# Altium PCB Module_Type_A.PcbDoc
Units mm, origin at the board's own origin, x right, y up, seen from the top; angles counter-clockwise.
Board outline 50 x 50 mm, 2 copper layers (Top Layer, Bottom Layer), stack 0.98 mm thick; 1 components, 26 nets, 72 pads, 72 vias.
Unrouted connection lines stored in the file: 32.
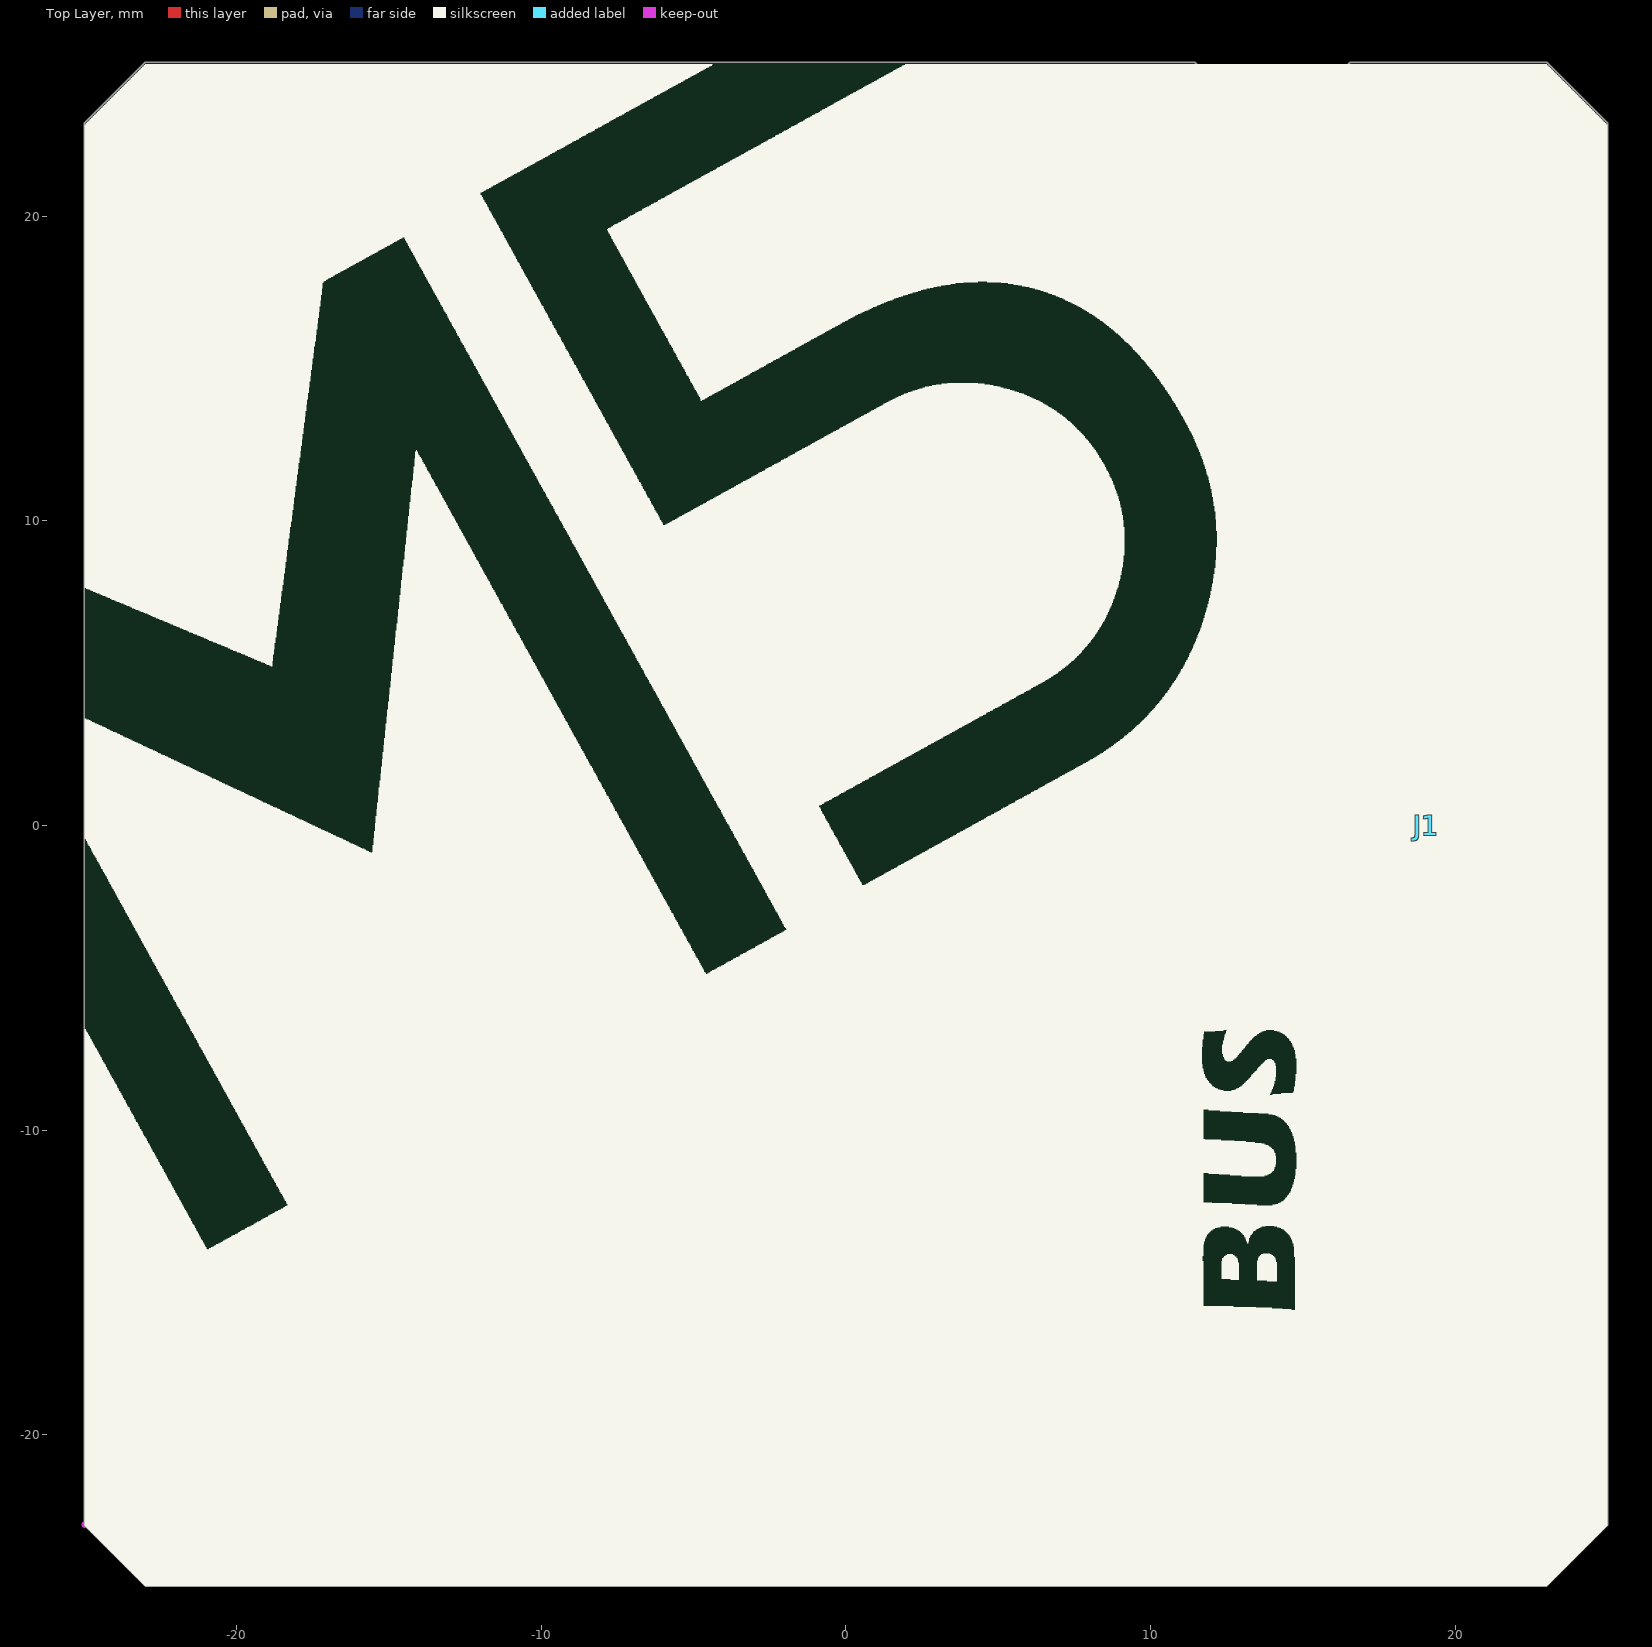
[diagram p0: Top Layer view]
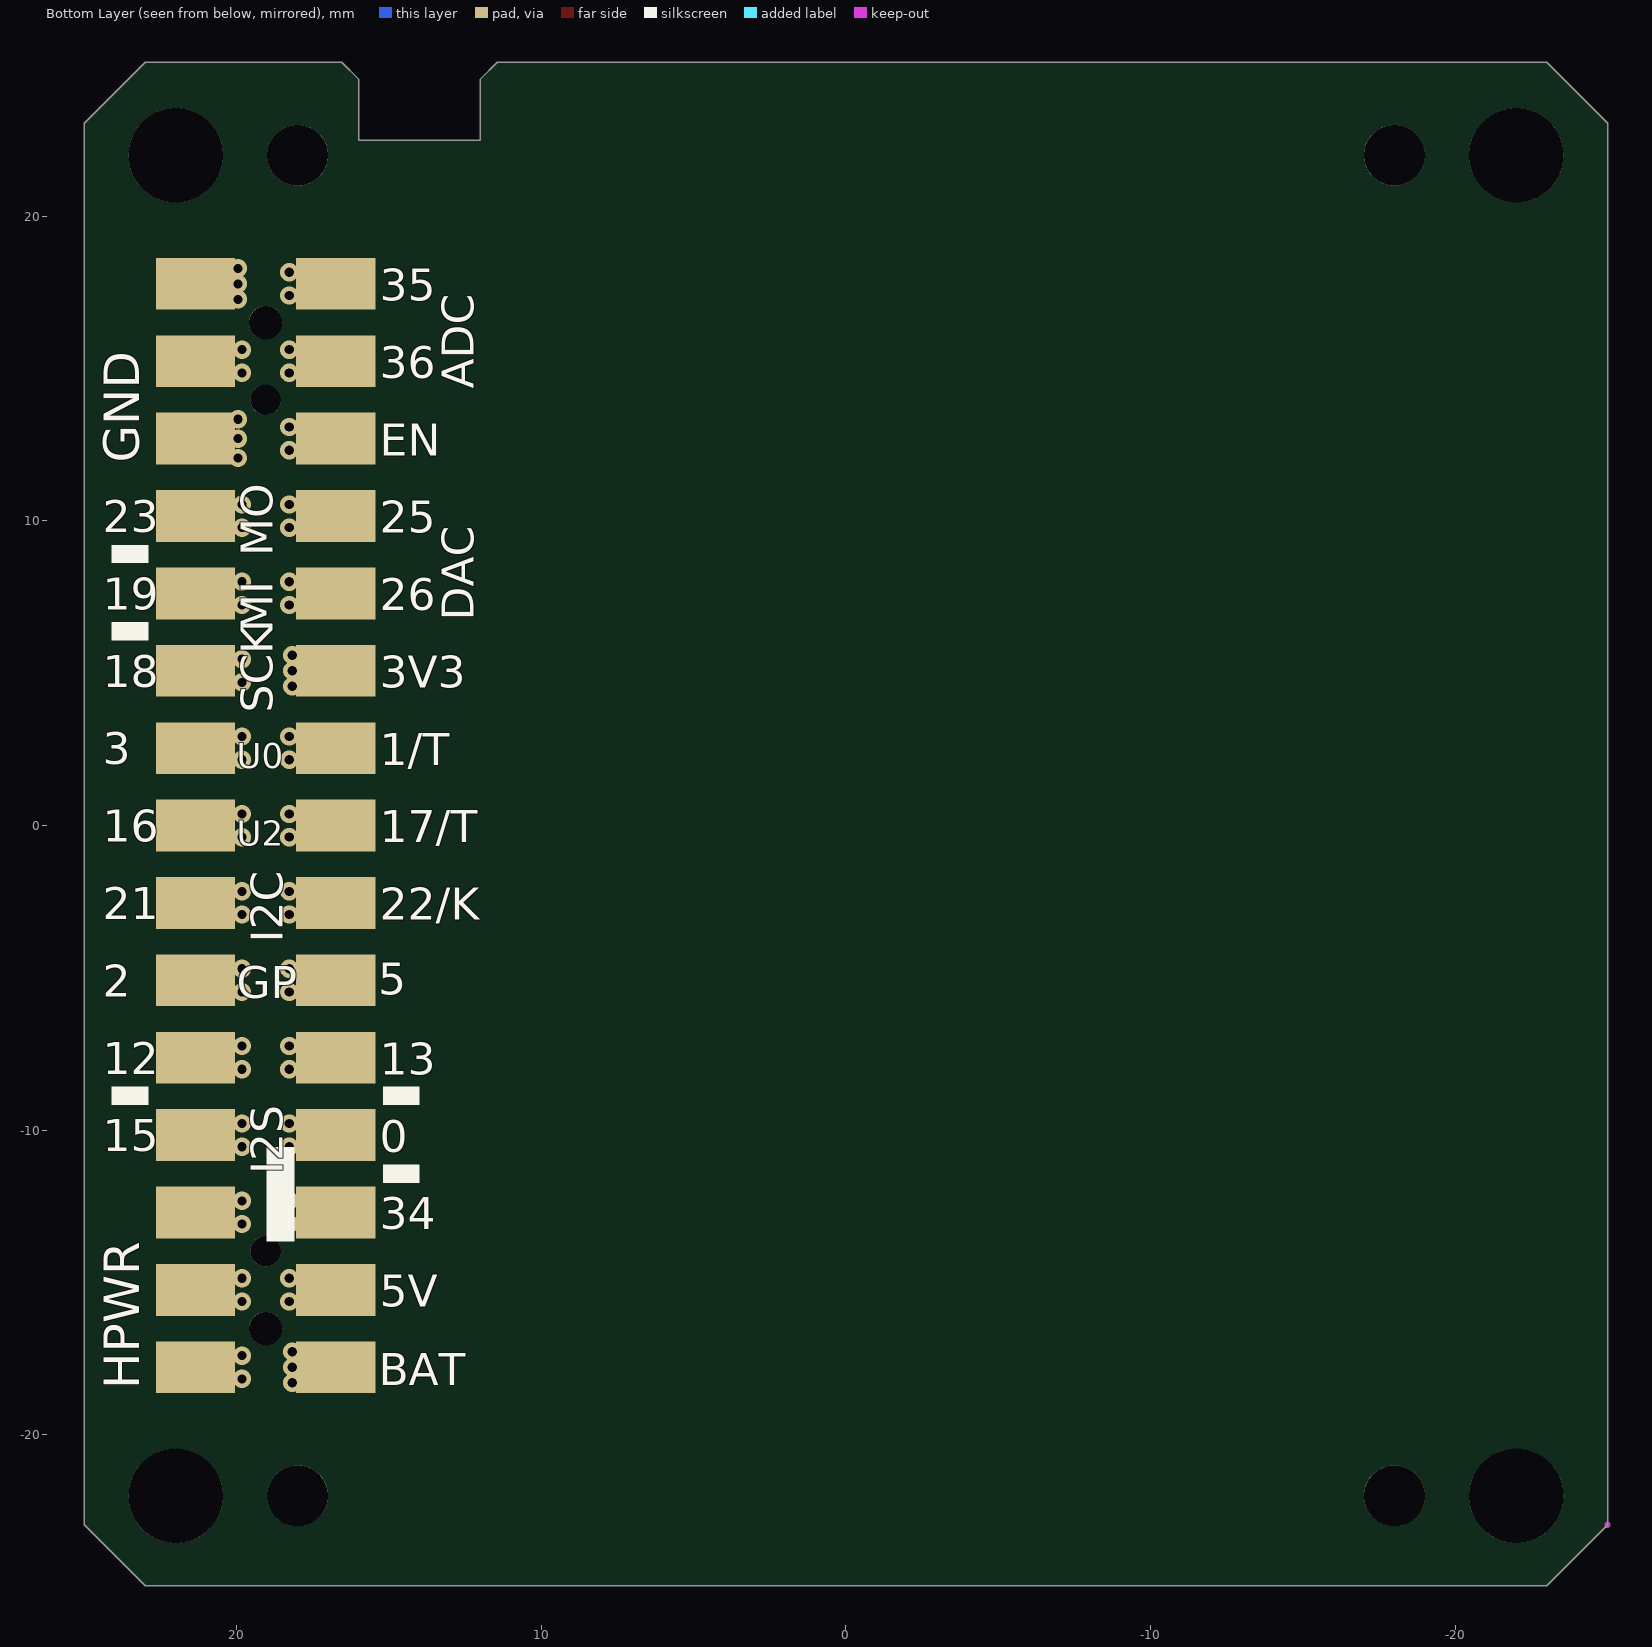
[diagram p1: Bottom Layer view, seen from below]

## Layer stack, top to bottom
Top Solder: solder mask 0.0102, Solder Resist, Dk 3.5
Top Layer: signal copper 0.0356
Dielectric1: dielectric 0.9086, FR-4, Dk 4.8
Bottom Layer: signal copper 0.0356
Bottom Solder: solder mask 0.0102, Solder Resist, Dk 3.5

## Board outline
-25,-22.949 -23,-24.949 23,-24.949 25,-22.949 25,23.051 23,25.051 16.551,25.051 16,24.5 16,22.5 12,22.5 12,24.5 11.449,25.051 -23,25.051 -25,23.051

## Design rules (kind name [scope] priority, off if disabled: settings)
Clearance [All] p1: gap=0.152 ignorepadtopadclearanceinfootprint=FALSE except(0: Arc-Hole Track-Hole SMDPad-Hole THPad-Hole Via-Hole Fill-Hole Poly-Hole Region-Hole Text-Hole)
PlaneConnect [All] p1: planeconnectstyle=Direct reliefexpansion=0.508 reliefentries=4 reliefconductorwidth=0.254 reliefairgap=0.254
PolygonConnect [All] p1: connectstyle=Direct reliefconductorwidth=0.254 reliefentries=4 polygonreliefangle="90 Angle" airgapwidth=0.254
RoutingVias [All] p1: holewidth=0.711 width=1.27 viastyle="Through Hole" minholewidth=0.711 minwidth=1.27 maxholewidth=0.711 maxwidth=1.27
SolderMaskExpansion [All] p1: expansion=0.102 istentingtop=FALSE
Width [All] p1: maxlimit=0.635 minlimit=0.152 preferedwidth=0.381 minimp=50.000000 maximp=50.000000 favimp=50.000000
29 further rules are at their usual default settings.

## Components (designator, comment, footprint, x,y, rotation, side; value= is the part's Value field where it differs from the comment)
J1 "M5Stack_BUS" M5Stack_BUS_30P 21.35,17.78 r0 top locked

## Footprints (in the part's own frame and the unit in brackets; to place one, negate y for a bottom-side part, rotate by r counter-clockwise, add the part's x,y. Pads: shape width x height; smd on the part's side, far side on the other; paste and mask are expansions set on the pad)
M5Stack_BUS_30P [mm]
  round 1 hole 1: 0(-2.3,-3.81) 0(-2.3,-31.75)
  round 1.1 hole 1.1: 0(-2.3,-1.27) 0(-2.3,-34.29)
  rect 2.6x1.7 smd: 1(0,0) 2(-4.6,0) 3(0,-2.54) 4(-4.6,-2.54) 5(0,-5.08) 6(-4.6,-5.08) 7(0,-7.62) 8(-4.6,-7.62) 9(0,-10.16) 10(-4.6,-10.16) 11(0,-12.7) 12(-4.6,-12.7) 13(0,-15.24) 14(-4.6,-15.24) 15(0,-17.78) 16(-4.6,-17.78) 17(0,-20.32) 18(-4.6,-20.32) 19(0,-22.86) 20(-4.6,-22.86) 21(0,-25.4) 22(-4.6,-25.4) 23(0,-27.94) 24(-4.6,-27.94) 25(0,-30.48) 26(-4.6,-30.48) 27(0,-33.02) 28(-4.6,-33.02) 29(0,-35.56) 30(-4.6,-35.56)
  rect 2.6x1.7 smd far side: 1(0,0) 2(-4.6,0) 3(0,-2.54) 4(-4.6,-2.54) 5(0,-5.08) 6(-4.6,-5.08) 7(0,-7.62) 8(-4.6,-7.62) 9(0,-10.16) 10(-4.6,-10.16) 11(0,-12.7) 12(-4.6,-12.7) 13(0,-15.24) 14(-4.6,-15.24) 15(0,-17.78) 16(-4.6,-17.78) 17(0,-20.32) 18(-4.6,-20.32) 19(0,-22.86) 20(-4.6,-22.86) 21(0,-25.4) 22(-4.6,-25.4) 23(0,-27.94) 24(-4.6,-27.94) 25(0,-30.48) 26(-4.6,-30.48) 27(0,-33.02) 28(-4.6,-33.02) 29(0,-35.56) 30(-4.6,-35.56)

## Free pads (board coordinates)
  round 3.1 hole 3.1: 0(-22,-22) 0(-22,22) 0(22,-22) 0(22,22)
  round 2 hole 2: 0(-18,-22) 0(-18,22) 0(18,-22) 0(18,22)

## Via types
v1: diameter 0.6, hole 0.3, Top Layer to Bottom Layer, tented both sides, 72 vias

## Nets (pads, with @x,y where several pads share a name; then routed paths per layer and width w, separated by ;. In a path a pad name is that pad's centre, name@x,y a point inside that pad or via, vN(x,y) a via of type N, cw(c..) or ccw(c..) an arc to the next point about the centre after c; other vN are vias at no path point)
3.3V: J1.12
  other v1: 18.175,4.572 18.175,5.08 18.175,5.588
5V: J1.28
  other v1: 18.274,-15.621 18.274,-14.859
BATTERY: J1.30
  other v1: 18.175,-18.288 18.175,-17.78 18.175,-17.272
EN: J1.6
  other v1: 18.274,12.319 18.274,12.319 18.274,13.081 18.274,13.081
GND: J1.1 J1.3 J1.5
  other v1: 19.953,12.065 19.953,12.7 19.953,13.335 19.826,14.859 19.826,15.621 19.953,17.272 19.953,17.78 19.953,18.288
GPIO0: J1.24
  other v1: 18.274,-10.541 18.274,-9.779
GPIO1: J1.14
  other v1: 18.274,2.159 18.274,2.921
GPIO2: J1.19
  other v1: 19.826,-5.461 19.826,-4.699
GPIO3: J1.13
  other v1: 19.826,2.159 19.826,2.921
GPIO5: J1.20
  other v1: 18.274,-5.461 18.274,-4.699
GPIO12: J1.21
  other v1: 19.826,-8.001 19.826,-7.239
GPIO13: J1.22
  other v1: 18.274,-8.001 18.274,-7.239
GPIO15: J1.23
  other v1: 19.826,-10.541 19.826,-9.779
GPIO16: J1.15
  other v1: 19.826,-0.381 19.826,0.381
GPIO17: J1.16
  other v1: 18.274,-0.381 18.274,0.381
GPIO18: J1.11
  other v1: 19.826,4.699 19.826,5.461
GPIO19: J1.9
  other v1: 19.826,7.239 19.826,7.239 19.826,8.001 19.826,8.001
GPIO21: J1.17
  other v1: 19.826,-2.921 19.826,-2.159
GPIO22: J1.18
  other v1: 18.274,-2.921 18.274,-2.159
GPIO23: J1.7
  other v1: 19.826,9.779 19.826,9.779 19.826,10.541 19.826,10.541
GPIO25: J1.8
  other v1: 18.274,9.779 18.274,9.779 18.274,10.541 18.274,10.541
GPIO26: J1.10
  other v1: 18.274,7.239 18.274,8.001
GPIO34: J1.26
  other v1: 18.274,-13.081 18.274,-12.319
GPIO35: J1.2
  other v1: 18.274,17.399 18.274,18.161
GPIO36: J1.4
  other v1: 18.274,14.859 18.274,15.621
HPWR: J1.25 J1.27 J1.29
  other v1: 19.826,-18.161 19.826,-17.399 19.826,-15.621 19.826,-14.859 19.826,-13.081 19.826,-12.319
pads on no net: J1.0

## Keep-outs
Keep-Out Layer:
  lines w0.2: -25,-22.949 -25,-22.949

## Silkscreen, mask and mechanical layers (free items; w line width, h text height)
Top Overlay:
  drawing of 5550 lines, arcs and shapes, not listed
Mechanical 1:
  lines w0.127: -25,-23 -25,23 -23,25 11.449,25 12,24.449 12,22.449 16,22.449 16,24.449 16.551,25 23,25 25,23 25,-23 23,-25 -23,-25 -25,-23 ; 0,-25 0,-25

## Text inside footprints (layer, text, board x,y; h text height)
J1: Bottom Overlay "35" at 15.3,16.88 h1.8; Bottom Overlay "I2S" at 18.15,-11.45 h1.8 r270; Bottom Overlay "5" at 15.35,-5.9 h1.8; Bottom Overlay "EN" at 15.3,11.8 h1.8; Bottom Overlay "16" at 24.4,-0.88 h1.8; Bottom Overlay "22/K" at 15.3,-3.44 h1.8; Bottom Overlay "17/T" at 15.3,-0.9 h1.8; Bottom Overlay "ADC" at 11.875,14.34 h1.8 r270; Bottom Overlay "26" at 15.3,6.72 h1.8; Bottom Overlay "25" at 15.3,9.26 h1.8; Bottom Overlay "U2" at 20,-0.94 h1.4; Bottom Overlay "15" at 24.4,-11.04 h1.8; Bottom Overlay "19" at 24.4,6.74 h1.8; Bottom Overlay "GND" at 22.8,11.9 h2 r270; Bottom Overlay "SCK" at 18.475,3.7 h1.8 r270; Bottom Overlay "GP" at 20,-6.02 h1.8; Bottom Overlay "MO" at 18.475,8.84 h1.8 r270; Bottom Overlay "34" at 15.3,-13.6 h1.8; Bottom Overlay "13" at 15.3,-8.52 h1.8; Bottom Overlay "U0" at 20,1.6 h1.4; Bottom Overlay "36" at 15.3,14.34 h1.8; Bottom Overlay "0" at 15.3,-11.06 h1.8; Bottom Overlay "HPWR" at 22.8,-18.5 h2 r270; Bottom Overlay "DAC" at 11.875,6.72 h1.8 r270; Bottom Overlay "3V3" at 15.3,4.18 h1.8; Bottom Overlay "2" at 24.4,-5.96 h1.8; Bottom Overlay "3" at 24.4,1.66 h1.8; Bottom Overlay "21" at 24.4,-3.42 h1.8; Bottom Overlay "5V" at 15.3,-16.14 h1.8; Bottom Overlay "12" at 24.4,-8.5 h1.8; Bottom Overlay "23" at 24.4,9.28 h1.8; Bottom Overlay "I2C" at 18.15,-3.85 h1.8 r270; Bottom Overlay "MI" at 18.475,6.34 h1.8 r270; Bottom Overlay "18" at 24.4,4.2 h1.8; Bottom Overlay "1/T" at 15.3,1.64 h1.8; Bottom Overlay "BAT" at 15.342,-18.72 h1.8